# Altium PCB button.PcbDoc
Units mm, origin at the board's own origin, x right, y up, seen from the top; angles counter-clockwise.
Board outline 267 x 26.02 mm, 2 copper layers (Top Layer, Bottom Layer), stack 1.58 mm thick; 43 components, 52 nets, 200 pads, 21 vias.
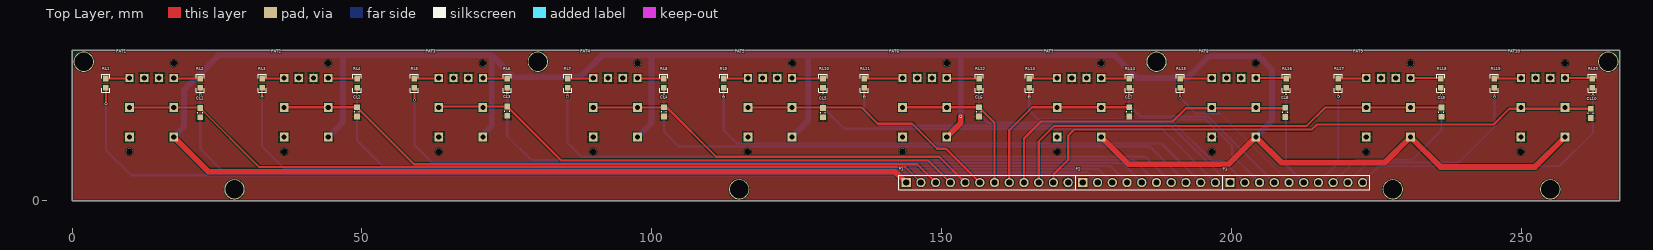
[diagram p0: Top Layer view]
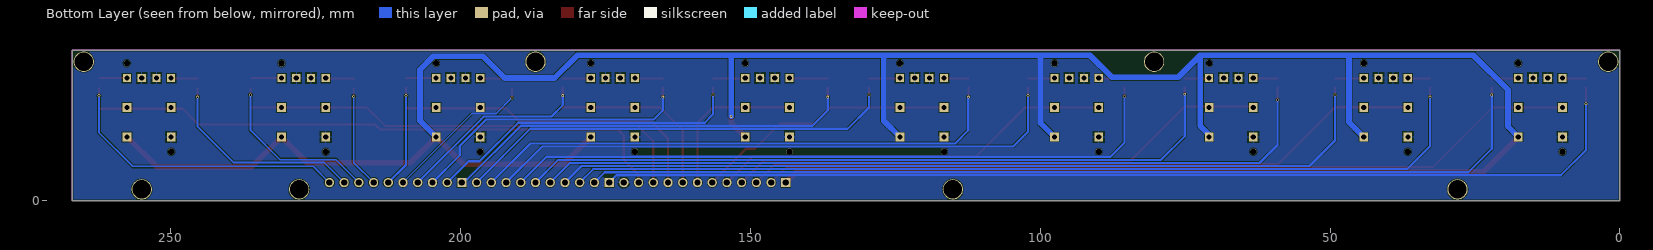
[diagram p1: Bottom Layer view, seen from below]
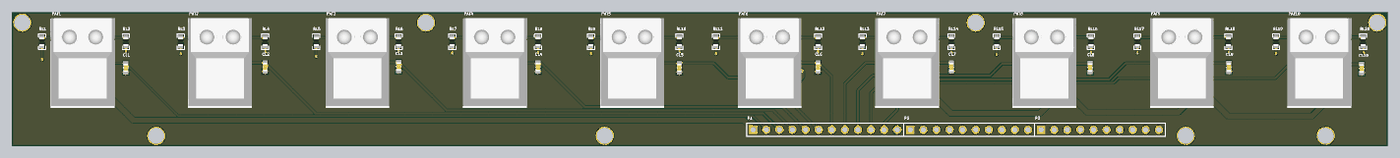
[diagram p2: 3D render of the assembled board from above, using the file's embedded part models]

## Layer stack, top to bottom
Top Solder: solder mask 0.0102, Solder Resist, Dk 3.5
Top Layer: signal copper 0.0356
Dielectric 1: dielectric 1.509, FR-4, Dk 4.8
Bottom Layer: signal copper 0.0356
Bottom Solder: solder mask 0.0102, Solder Resist, Dk 3.5

## Board outline
0,0 267,0 267,26.016 0,26.016

## Design rules (kind name [scope] priority, off if disabled: settings)
Clearance [All] p1: gap=0.15 ignorepadtopadclearanceinfootprint=FALSE
ComponentClearance [All] p1 off: gap=0.254 collisioncheckmode=3 verticalgap=2540 showdistances=FALSE
Height [All] p1: minheight=0 maxheight=100 prefheight=12.7
HoleSize [All] p1 off: absolutevalues=TRUE maxlimit=2.54 minlimit=0.025 maxpercent=80.000 minpercent=20.000
HoleToHoleClearance [All] p1 off: gap=0.254 allowstackedmicrovias=TRUE
MinimumSolderMaskSliver [All] p1 off: minsoldermaskwidth=0.254
PolygonConnect [All] p1: thpad.connectstyle=Relief thpad.reliefconductorwidth=0.254 thpad.reliefentries=4 thpad.polygonreliefangle="90 Angle" thpad.airgapwidth=0.254 smdpad.connectstyle=Relief smdpad.reliefconductorwidth=0.254 smdpad.reliefentries=4 smdpad.polygonreliefangle="90 Angle" smdpad.airgapwidth=0.254 via.connectstyle=Direct via.reliefconductorwidth=0.254 via.reliefentries=4 via.polygonreliefangle="90 Angle" via.airgapwidth=0.254
RoutingVias [All] p1: holewidth=0.3 width=0.5 viastyle="Through Hole" minholewidth=0.2 minwidth=0.4 maxholewidth=8 maxwidth=10
SilkToSilkClearance [All] p1 off: silktosilkclearance=0.254
SilkToSolderMaskClearance [IsPad] p1 off: minsilkscreentomaskgap=0.254 clearancetoexposedcopper=TRUE
SolderMaskExpansion SolderMaskExpansion_1 [IsVia] p1: expansion=0 soldermaskfromhole=TRUE
SolderMaskExpansion [All] p2: expansion=0.102
Width [All] p1: maxlimit=50 minlimit=0.2 preferedwidth=0.3
23 further rules are at their usual default settings.

## Components (designator, comment, footprint, x,y, rotation, side; value= is the part's Value field where it differs from the comment)
CL1 "0603" C0603 22.09,15.24 r90 top value=0.1uF
CL2 "0603" C0603 49.141,15.367 r90 top value=0.1uF
CL3 "0603" C0603 75.049,15.494 r90 top value=0.1uF
CL4 "0603" C0603 102.1,15.367 r90 top value=0.1uF
CL5 "0603" C0603 129.532,15.24 r90 top value=0.1uF
CL6 "0603" C0603 156.456,15.367 r90 top value=0.1uF
CL7 "0603" C0603 182.364,15.367 r90 top value=0.1uF
CL8 "0603" C0603 209.288,15.278 r90 top value=0.1uF
CL9 "0603" C0603 236.212,15.329 r90 top value=0.1uF
CL10 "0603" C0603 261.993,15.113 r90 top value=0.1uF
P1 "NC" "12P HEADER" 143.883,3.175 r0 top
P2 "NC" "10P HEADER" 174.363,3.175 r0 top
P3 "NC" "10P HEADER" 199.763,3.175 r0 top
PAT1 "55?-2LED01" 5501-2LED 13.708,16.129 r270 top
PAT2 "55?-2LED01" 5501-2LED 40.378,16.129 r270 top
PAT3 "55?-2LED01" 5501-2LED 67.048,16.129 r270 top
PAT4 "55?-2LED01" 5501-2LED 93.718,16.129 r270 top
PAT5 "55?-2LED01" 5501-2LED 120.388,16.129 r270 top
PAT6 "55?-2LED01" 5501-2LED 147.058,16.129 r270 top
PAT7 "55?-2LED01" 5501-2LED 173.728,16.129 r270 top
PAT8 "55?-2LED01" 5501-2LED 200.398,16.129 r270 top
PAT9 "55?-2LED01" 5501-2LED 227.068,16.129 r270 top
PAT10 "55?-2LED01" 5501-2LED 253.738,16.129 r270 top
RL1 "0603" R0603 5.834,20.32 r90 top value=330
RL2 "0603" R0603 22.09,20.32 r90 top value=330
RL3 "0603" R0603 32.758,20.32 r90 top value=330
RL4 "0603" R0603 49.141,20.32 r90 top value=330
RL5 "0603" R0603 59.047,20.32 r90 top value=330
RL6 "0603" R0603 75.049,20.32 r90 top value=330
RL7 "0603" R0603 85.463,20.32 r90 top value=330
RL8 "0603" R0603 102.1,20.32 r90 top value=330
RL9 "0603" R0603 112.387,20.32 r90 top value=330
RL10 "0603" R0603 129.532,20.32 r90 top value=330
RL11 "0603" R0603 136.644,20.32 r90 top value=330
RL12 "0603" R0603 156.456,20.32 r90 top value=330
RL13 "0603" R0603 165.092,20.32 r90 top value=330
RL14 "0603" R0603 182.364,20.32 r90 top value=330
RL15 "0603" R0603 191.127,20.32 r90 top value=330
RL16 "0603" R0603 209.415,20.32 r90 top value=330
RL17 "0603" R0603 218.432,20.32 r90 top value=330
RL18 "0603" R0603 236.085,20.32 r90 top value=330
RL19 "0603" R0603 245.356,20.32 r90 top value=330
RL20 "0603" R0603 262.247,20.32 r90 top value=330

## Footprints (in the part's own frame and the unit in brackets; to place one, negate y for a bottom-side part, rotate by r counter-clockwise, add the part's x,y. Pads: shape width x height; smd on the part's side, far side on the other; paste and mask are expansions set on the pad)
"10P HEADER" [mm] "Connector; Header; 10 Position"
  rect 1.6x1.6 hole 1.1: 1(0,0)
  round 1.6 hole 1.1: 2(2.54,0) 3(5.08,0) 4(7.62,0) 5(10.16,0) 6(12.7,0) 7(15.24,0) 8(17.78,0) 9(20.32,0) 10(22.86,0)
  silkscreen extent -1.27,-1.27 24.13,1.27
"12P HEADER" [mm] "Connector; Header; 12 Position"
  rect 1.6x1.6 hole 1.1: 1(0,0)
  round 1.6 hole 1.1: 2(2.54,0) 3(5.08,0) 4(7.62,0) 5(10.16,0) 6(12.7,0) 7(15.24,0) 8(17.78,0) 9(20.32,0) 10(22.86,0) 11(25.4,0) 12(27.94,0)
  silkscreen extent -1.27,-1.27 29.21,1.27
5501-2LED [mil] "5501-2LED"
  rect 59.06x59.06 / inner rect 60x60 / far side rect 59.06x59.06 hole 35.43: 1A(0,150) 1B(0,-150) NC(200,-150) NO(200,150)
  rect 56x56 / inner rect 60x60 / far side rect 56x56 hole 35.43: +G(-200,150) +R(-200,-150) -G(-200,50) -R(-200,-50)
  round 43.31 hole 43.31 unplated: MH1(-300,150) MH2(300,-150)
  body extent -344,-244 344,244, height 555
C0603 [mm] "0603_095"
  rect 1x1 smd: 1(-0.8,0) 2(0.8,0)
  silkscreen extent -0.08,-0.41 0.08,0.41, body extent -0.93,-0.41 0.93,0.41, height 0.81
R0603 [mm] "0603 from SM-752 data"
  rect 1x0.95 smd: 1(-0.8,0) 2(0.8,0)
  silkscreen extent -1.52,-0.69 1.52,0.69, body extent -0.87,-0.47 0.88,0.48, height 0.54

## Part data
CL1 CL2 CL3 CL4 CL5 CL6 CL7 CL8 CL9 CL10: library part Cap, "CAP CER 0.1UF 50V X5R 0603", Capacitance=100nF, Case Code (Metric)=1608, Dielectric=X5R, Manufacturer 1=Yageo, Manufacturer Part Number 1=CC0603KRX5R9BB104, Max Operating Temperature=85°C, Min Operating Temperature=-55°C, Package Quantity=4000, Supplier Part Number 1=311-4046-1-ND, Tolerance=10%, Voltage Rating=50V, Case/Package=0603, Case Code (Imperial)=0603, ComponentLink1Description=https://datasheet.ciiva.com/30062/tmk212bbj106kg-t-30062083.pdf?src-supplier=Onlinecomponents.com, ComponentLink1URL=https://datasheet.ciiva.com/30062/tmk212bbj106kg-t-30062083.pdf?src-supplier=Onlinecomponents.com, ComponentLink2Description=https://datasheet.ciiva.com/139/mlcc-all-e-139570.pdf?src-supplier=Digi-Key, ComponentLink2URL=https://datasheet.ciiva.com/139/mlcc-all-e-139570.pdf?src-supplier=Digi-Key, ComponentLink3Description=https://datasheet.ciiva.com/139/mlcc-all-e-139571.pdf?src-supplier=Digi-Key, ComponentLink3URL=https://datasheet.ciiva.com/139/mlcc-all-e-139571.pdf?src-supplier=Digi-Key, ComponentLink4Description=https://datasheet.ciiva.com/139/mlcc-all-e-139572.pdf?src-supplier=Digi-Key, ComponentLink4URL=https://datasheet.ciiva.com/139/mlcc-all-e-139572.pdf?src-supplier=Digi-Key, ComponentLink5Description=https://datasheet.ciiva.com/7975/1481447-7975820.pdf?src-supplier=Element14, ComponentLink5URL=https://datasheet.ciiva.com/7975/1481447-7975820.pdf?src-supplier=Element14, ComponentLink6Description=https://datasheet.ciiva.com/144/mlccorderingcode-144037.pdf?src-supplier=Digi-Key, ComponentLink6URL=https://datasheet.ciiva.com/144/mlccorderingcode-144037.pdf?src-supplier=Digi-Key, ComponentLink7Description=https://datasheet.ciiva.com/8033/1489800-8033669.pdf?src-supplier=Element14, ComponentLink7URL=https://datasheet.ciiva.com/8033/1489800-8033669.pdf?src-supplier=Element14, ComponentLink8Description=https://datasheet.ciiva.com/15189/getdatasheetpartid-321421-15189125.pdf?src-supplier=Verical, ComponentLink8URL=https://datasheet.ciiva.com/15189/getdatasheetpartid-321421-15189125.pdf?src-supplier=Verical, ComponentLink9Description=https://datasheet.ciiva.com/144/mlccorderingcode-144038.pdf?src-supplier=Digi-Key, ComponentLink9URL=https://datasheet.ciiva.com/144/mlccorderingcode-144038.pdf?src-supplier=Digi-Key, ComponentLink10Description=https://datasheet.ciiva.com/28450/1489800-28450342.pdf?src-supplier=Element14, ComponentLink10URL=https://datasheet.ciiva.com/28450/1489800-28450342.pdf?src-supplier=Element14, ComponentLink11Description=https://datasheet.ciiva.com/144/mlccorderingcode-144039.pdf?src-supplier=Digi-Key, ComponentLink11URL=https://datasheet.ciiva.com/144/mlccorderingcode-144039.pdf?src-supplier=Digi-Key, ComponentLink12Description=https://datasheet.ciiva.com/8033/1489800-8033671.pdf?src-supplier=Element14, ComponentLink12URL=https://datasheet.ciiva.com/8033/1489800-8033671.pdf?src-supplier=Element14, ComponentLink13Description=http://www.farnell.com/datasheets/1872206.pdf?src-supplier=Farnell, ComponentLink13URL=http://www.farnell.com/datasheets/1872206.pdf?src-supplier=Farnell, ComponentLink14Description=http://uk.rs-online.com/webdocs/144c/0900766b8144c113.pdf?src-supplier=RSComponents, ComponentLink14URL=http://uk.rs-online.com/webdocs/144c/0900766b8144c113.pdf?src-supplier=RSComponents, ComponentLink15Description=http://www.farnell.com/datasheets/2048008.pdf?src-supplier=Farnell, ComponentLink15URL=http://www.farnell.com/datasheets/2048008.pdf?src-supplier=Farnell, ComponentLink16Description=http://www.mouser.com/ds/2/281/c02e-2905.pdf?src-supplier=Mouser, ComponentLink16URL=http://www.mouser.com/ds/2/281/c02e-2905.pdf?src-supplier=Mouser, ComponentLink17Description=http://components.arrow.com/part/dataview/0323_06361249?src-supplier=Arrow+Europe, ComponentLink17URL=http://components.arrow.com/part/dataview/0323_06361249?src-supplier=Arrow+Europe, ComponentLink18Description=https://search.murata.co.jp/Ceramy/image/img/A01X/G101/ENG/GRM155R71E104KE14-01.pdf?src-supplier=Digi-Key, ComponentLink18URL=https://search.murata.co.jp/Ceramy/image/img/A01X/G101/ENG/GRM155R71E104KE14-01.pdf?src-supplier=Digi-Key, ComponentLink19Description=http://www.farnell.com/datasheets/2048008.pdf?src-supplier=Newark, ComponentLink19URL=http://www.farnell.com/datasheets/2048008.pdf?src-supplier=Newark, ComponentLink20Description=http://psearch.en.murata.com/capacitor/product/GRM155R71E104KE14%23.pdf?src-supplier=Avnet, ComponentLink20URL=http://psearch.en.murata.com/capacitor/product/GRM155R71E104KE14%23.pdf?src-supplier=Avnet, ComponentLink21Description=http://www.farnell.com/datasheets/2048008.pdf?src-supplier=Element14, ComponentLink21URL=http://www.farnell.com/datasheets/2048008.pdf?src-supplier=Element14, ComponentLink22Description=http://www.mouser.com/ds/2/447/Yageo_UPY-GP_NP0_16V-to-50V_9-358835.pdf?src-supplier=Mouser, ComponentLink22URL=http://www.mouser.com/ds/2/447/Yageo_UPY-GP_NP0_16V-to-50V_9-358835.pdf?src-supplier=Mouser, ComponentLink23Description=http://www.yageo.com/documents/recent/UPY-GPHC_X5R_4V-to-50V_25.pdf?src-supplier=Digi-Key, ComponentLink23URL=http://www.yageo.com/documents/recent/UPY-GPHC_X5R_4V-to-50V_25.pdf?src-supplier=Digi-Key, ComponentLink24Description=http://www.yageo.com/exep/pages/download/literatures/ProductSelectionGuide%202014_Final_2.pdf?src-supplier=Digi-Key, ComponentLink24URL=http://www.yageo.com/exep/pages/download/literatures/ProductSelectionGuide%202014_Final_2.pdf?src-supplier=Digi-Key, Halogen Free="Halogen Free", Lead Free="Lead Free", Length=0.063inch, Mount="Surface Mount", Packaging="Tape and Reel", Pricing 1="1=0.10000, 10=0.05600, 50=0.03080, 100=0.02510, 500=0.01794, 1000=0.01410 (USD)", RoHS=Yes, Stock 1=3816, Supplier 1=Digi-Key, Termination=SMD/SMT, Thickness=0.035inch, Voltage Rating (DC)=50V, Weight=7.1E-05oz, Width=0.031inch
P1: library part "Header 12", "Header, 12-Pin", LatestRevisionDate=17-Jul-2002, LatestRevisionNote="Re-released for DXP Platform.", Publisher="Altium Limited"
P2 P3: library part "Header 10", "Header, 10-Pin", LatestRevisionDate=17-Jul-2002, LatestRevisionNote="Re-released for DXP Platform.", Publisher="Altium Limited"
PAT1 PAT2 PAT3 PAT4 PAT5 PAT6 PAT7 PAT8 PAT9 PAT10: library part 5501MBLKREDGRN, "Pushbutton Switch SPDT Keyswitch, Illuminated Through Hole", Current Rating=300mA, Manufacturer 1=E-Switch, Max Operating Temperature=65°C, Min Operating Temperature=-25°C, Package Quantity=500, Supplier Part Number 1=EG171571-ND, Voltage Rating (DC)=12V, Actuator Type="Square, Button", ComponentLink1Description=https://datasheet.ciiva.com/2870/xr0104p-2870260.pdf?src-supplier=Digi-Key, ComponentLink1URL=https://datasheet.ciiva.com/2870/xr0104p-2870260.pdf?src-supplier=Digi-Key, Illumination Type=LED, Manufacturer Part Number 1=5501MBLKREDGRN, Mechanical Life=500000Cycles, Mount="Through Hole", Packaging=Bulk, Pricing 1="1=5.08000, 10=4.53000, 25=4.28800, 50=4.13420, 100=3.93620, 250=3.76028, 500=3.43044, 1000=3.25452 (USD)", RoHS=Yes, Stock 1=420, Supplier 1=Digi-Key, Switch Function=On-Mom, Termination="PC Pin", Throw Configuration=SPDT
RL1 RL2 RL3 RL4 RL5 RL6 RL7 RL8 RL9 RL10 RL11 RL12 RL13 RL14 RL15 RL16 RL17 RL18 RL19 RL20: library part Res1, "RES SMD 330 OHM 1% 1/10W 0603", Case Code (Metric)=1608, Manufacturer 1=Yageo, Manufacturer Part Number 1=RC0603FR-07330RL, Max Operating Temperature=155°C, Max Power Dissipation=100mW, Min Operating Temperature=-55°C, Package Quantity=1, Resistance=330R, Supplier Part Number 1=311-330HRCT-ND, Temperature Coefficient=100ppm/°C, Tolerance=1%, Voltage Rating=50V, Case/Package=0603, Case Code (Imperial)=0603, ComponentLink1Description=https://datasheet.ciiva.com/11819/0900766b80c66297-11819490.pdf?src-supplier=RSComponents, ComponentLink1URL=https://datasheet.ciiva.com/11819/0900766b80c66297-11819490.pdf?src-supplier=RSComponents, ComponentLink2Description=https://datasheet.ciiva.com/7849/1018594-7849962.pdf?src-supplier=Element14, ComponentLink2URL=https://datasheet.ciiva.com/7849/1018594-7849962.pdf?src-supplier=Element14, ComponentLink3Description=https://datasheet.ciiva.com/17083/pyu-rc0402-51-rohs-l-6-r-17083994.pdf?src-supplier=Future+Electronics, ComponentLink3URL=https://datasheet.ciiva.com/17083/pyu-rc0402-51-rohs-l-6-r-17083994.pdf?src-supplier=Future+Electronics, ComponentLink4Description=https://datasheet.ciiva.com/7849/1018594-7849963.pdf?src-supplier=Element14, ComponentLink4URL=https://datasheet.ciiva.com/7849/1018594-7849963.pdf?src-supplier=Element14, ComponentLink5Description=https://datasheet.ciiva.com/2453/pyu-r-int-thick-7-2453661.pdf?src-supplier=Digi-Key, ComponentLink5URL=https://datasheet.ciiva.com/2453/pyu-r-int-thick-7-2453661.pdf?src-supplier=Digi-Key, ComponentLink6Description=https://datasheet.ciiva.com/2453/pyu-r-int-thick-7-2453662.pdf?src-supplier=Digi-Key, ComponentLink6URL=https://datasheet.ciiva.com/2453/pyu-r-int-thick-7-2453662.pdf?src-supplier=Digi-Key, ComponentLink7Description=https://datasheet.ciiva.com/2453/pyu-r-int-thick-7-2453663.pdf?src-supplier=Digi-Key, ComponentLink7URL=https://datasheet.ciiva.com/2453/pyu-r-int-thick-7-2453663.pdf?src-supplier=Digi-Key, ComponentLink8Description=https://datasheet.ciiva.com/12656/pyu-rc0402-51-rohs-l-6-r-12656815.pdf?src-supplier=Mouser, ComponentLink8URL=https://datasheet.ciiva.com/12656/pyu-rc0402-51-rohs-l-6-r-12656815.pdf?src-supplier=Mouser, ComponentLink9Description=https://datasheet.ciiva.com/11819/0900766b80f96399-11819327.pdf?src-supplier=RSComponents, ComponentLink9URL=https://datasheet.ciiva.com/11819/0900766b80f96399-11819327.pdf?src-supplier=RSComponents, ComponentLink10Description=https://datasheet.ciiva.com/2454/pyu-r-int-thick-7-2454864.pdf?src-supplier=Digi-Key, ComponentLink10URL=https://datasheet.ciiva.com/2454/pyu-r-int-thick-7-2454864.pdf?src-supplier=Digi-Key, ComponentLink11Description=https://datasheet.ciiva.com/2454/pyu-r-int-thick-7-2454865.pdf?src-supplier=Digi-Key, ComponentLink11URL=https://datasheet.ciiva.com/2454/pyu-r-int-thick-7-2454865.pdf?src-supplier=Digi-Key, ComponentLink12Description=https://datasheet.ciiva.com/2454/pyu-r-int-thick-7-2454866.pdf?src-supplier=Digi-Key, ComponentLink12URL=https://datasheet.ciiva.com/2454/pyu-r-int-thick-7-2454866.pdf?src-supplier=Digi-Key, ComponentLink13Description=https://datasheet.ciiva.com/12555/rc0603-272842-12555334.pdf?src-supplier=Mouser, ComponentLink13URL=https://datasheet.ciiva.com/12555/rc0603-272842-12555334.pdf?src-supplier=Mouser, ComponentLink14Description=https://datasheet.ciiva.com/46440/1868787-46440904.pdf?src-supplier=Element14, ComponentLink14URL=https://datasheet.ciiva.com/46440/1868787-46440904.pdf?src-supplier=Element14, ComponentLink15Description=https://datasheet.ciiva.com/7746/443971-7746329.pdf?src-supplier=Element14, ComponentLink15URL=https://datasheet.ciiva.com/7746/443971-7746329.pdf?src-supplier=Element14, ComponentLink16Description=https://datasheet.ciiva.com/7746/443971-7746330.pdf?src-supplier=Element14, ComponentLink16URL=https://datasheet.ciiva.com/7746/443971-7746330.pdf?src-supplier=Element14, ComponentLink17Description=https://datasheet.ciiva.com/7746/1686128-7746331.pdf?src-supplier=Element14, ComponentLink17URL=https://datasheet.ciiva.com/7746/1686128-7746331.pdf?src-supplier=Element14, Composition="Thick Film", Depth=0.8mm, Features="Moisture Resistant", Height=0.45mm, Lead Free="Lead Free", Length=1.6mm, Number of Pins=2, Number of Terminations=2, Packaging="Tape and Reel", Power Rating=100mW, Pricing 1="1=0.10000, 10=0.02300, 100=0.00940, 1000=0.00421, 2500=0.00366 (USD)", REACH SVHC="No SVHC", RoHS=Yes, Stock 1=3885547, Supplier 1=Digi-Key, Termination=SMD/SMT, Voltage Rating (DC)=50V, Width=0.8mm

## Free pads (board coordinates)
  round 3.5 hole 3.175: ""(2,24.016) ""(28,2) ""(80.354,24.016) ""(115.062,2) ""(187.071,24.016) ""(227.838,2) ""(255,2) ""(265,24.016)

## Via types
v1: diameter 0.5, hole 0.3, Top Layer to Bottom Layer, 21 vias

## Nets (pads, with @x,y where several pads share a name; then routed paths per layer and width w, separated by ;. In a path a pad name is that pad's centre, name@x,y a point inside that pad or via, vN(x,y) a via of type N, cw(c..) or ccw(c..) an arc to the next point about the centre after c; other vN are vias at no path point)
5V: P1.1 PAT1.NO PAT2.NO PAT3.NO PAT4.NO PAT5.NO PAT6.NO PAT7.NO PAT8.NO PAT9.NO PAT10.NO | length 516.1
  Top Layer w1: PAT1.NO 23.525,5.042 142.016,5.042 P1.1 ; PAT6.NO 153.289,13.47 v1(153.289,14.605) ; PAT7.NO 182.237,6.35 199.509,6.35 PAT8.NO 208.653,6.604 226.433,6.604 PAT9.NO 236.085,5.842 252.341,5.842 PAT10.NO
  Bottom Layer w1: PAT1.NO 19.304,12.835 19.304,19.177 25.273,25.146 46.736,25.146 ; PAT2.NO 46.736,13.597 46.736,25.146 ; PAT3.NO 70.858,11.422 72.39,12.954 72.39,25.146 ; PAT4.NO 99.949,13.47 99.949,25.146 ; PAT5.NO 127,13.851 127,25.146 ; v1(153.289,14.605) 153.289,24.892 153.035,25.146 ; PAT8.NO 207.01,13.851 207.01,22.644 204.705,24.949 196.145,24.949 192.391,21.195 183.783,21.195 179.832,25.146 153.035,25.146 ; 46.736,25.146 72.39,25.146 ; 72.39,25.146 76.2,21.336 87.63,21.336 91.44,25.146 99.949,25.146 ; 99.949,25.146 127,25.146 ; 127,25.146 153.035,25.146
BTN1: CL1.2 P1.2 PAT1.1A PAT1.1B | length 141.9
  Top Layer w0.3: PAT1.1B PAT1.1A 22.001,16.129 CL1.2 32.288,5.842 143.756,5.842 P1.2
BTN2: CL2.2 P1.3 PAT2.1A PAT2.1B | length 117.8
  Top Layer w0.381: PAT2.1B 36.606,16.167 CL2.2 58.958,6.35 145.788,6.35 P1.3
BTN3: CL3.2 P1.4 PAT3.1A PAT3.1B | length 93.8
  Top Layer w0.381: PAT3.1B 63.403,16.294 CL3.2 84.358,6.985 147.693,6.985 P1.4
BTN4: CL4.2 P1.5 PAT4.1A PAT4.1B | length 69.5
  Top Layer w0.381: PAT4.1B PAT4.1A 102.616,16.129 111.127,7.618 149.6,7.618 P1.5
BTN5: CL5.2 P1.6 PAT5.1A PAT5.1B | length 45.4
  Top Layer w0.381: PAT5.1B PAT5.1A 136.198,16.129 138.992,13.335 144.907,13.335 149.225,9.017 150.741,9.017 P1.6
BTN6: CL6.2 P1.7 PAT6.1A PAT6.1B | length 27.3
  Top Layer w0.381: PAT6.1B 143.286,16.167 CL6.2 159.123,13.5 P1.7
BTN7: CL7.2 P1.8 PAT7.1A PAT7.1B | length 31.4
  Top Layer w0.381: P1.8 161.663,12.184 165.646,16.167 CL7.2
BTN8: CL8.2 P1.9 PAT8.1A PAT8.1B | length 54.9
  Top Layer w0.381: P1.9 164.203,10.787 167.132,13.716 189.865,13.716 192.151,16.002 209.212,16.002 CL8.2
BTN9: CL9.2 P1.10 PAT9.1A PAT9.1B | length 79
  Top Layer w0.381: P1.10 166.743,10.279 169.418,12.954 212.979,12.954 216.154,16.129 PAT9.1B PAT9.1A CL9.2
BTN10: CL10.2 P1.11 PAT10.1A PAT10.1B | length 101.3
  Top Layer w0.381: P1.11 169.283,4.564 171.831,7.112 171.831,11.303 172.847,12.319 213.868,12.319 214.757,13.208 245.237,13.208 247.942,15.913 CL10.2
G1: P2.2 RL2.1 | length 167.7
  Top Layer w0.381: RL2.1 22.094,19.516 22.094,18.292 v1(22.098,18.288)
  Bottom Layer w0.381: v1(22.098,18.288) 22.098,9.017 26.152,4.963 175.115,4.963 P2.2
G2: P2.4 RL4.1 | length 144.9
  Top Layer w0.381: RL4.1 49.145,19.516 49.145,18.292 v1(49.149,18.288)
  Bottom Layer w0.381: v1(49.149,18.288) 49.149,10.414 53.538,6.025 179.133,6.025 P2.4
G3: P2.6 RL6.1 | length 123.7
  Top Layer w0.381: RL6.1 75.053,19.516 75.053,18.419 v1(75.057,18.415)
  Bottom Layer w0.381: v1(75.057,18.415) 75.057,11.176 79.146,7.087 183.151,7.087 P2.6
G4: P2.8 RL8.1 | length 101.3
  Top Layer w0.381: RL8.1 102.104,19.516 102.104,18.165 v1(102.108,18.161)
  Bottom Layer w0.381: v1(102.108,18.161) 102.108,11.938 104.646,9.4 185.919,9.4 P2.8
G5: P2.10 RL10.1 | length 76.4
  Top Layer w0.381: RL10.1 129.536,19.516 129.536,18.292 v1(129.54,18.288)
  Bottom Layer w0.381: v1(129.54,18.288) 129.54,16.129 133.223,12.446 187.952,12.446 P2.10
G6: P3.2 RL12.1 | length 55.3
  Top Layer w0.381: RL12.1 156.46,19.516 156.46,18.292 v1(156.464,18.288)
  Bottom Layer w0.381: v1(156.464,18.288) 156.464,14.905 157.861,13.508 190.065,13.508 196.715,6.858 198.62,6.858 P3.2
G7: P3.4 RL14.1 | length 33.5
  Top Layer w0.381: RL14.1 182.368,19.516 182.368,18.165 v1(182.372,18.161)
  Bottom Layer w0.381: v1(182.372,18.161) 182.372,16.533 184.317,14.588 195.97,14.588 196.444,14.115 P3.4
G8: P3.6 RL16.1 | length 17.6
  Top Layer w0.381: RL16.1 209.419,19.516 209.419,18.165 v1(209.423,18.161)
  Bottom Layer w0.381: v1(209.423,18.161) 209.423,6.215 P3.6
G9: P3.8 RL18.1 | length 29.8
  Top Layer w0.3: RL18.1 236.22,19.385 v1(236.22,18.288)
  Bottom Layer w0.3: P3.8 221.48,7.112 231.14,7.112 236.22,12.192 v1(236.22,18.288)
G10: P3.10 RL20.1 | length 51.1
  Top Layer w0.3: RL20.1 262.382,19.385 v1(262.382,18.161)
  Bottom Layer w0.3: P3.10 225.417,5.969 256.54,5.969 262.382,11.811 v1(262.382,18.161)
GND: CL1.1 CL2.1 CL3.1 CL4.1 CL5.1 CL6.1 CL7.1 CL8.1 CL9.1 CL10.1 P1.12 PAT1.-G PAT1.-R PAT1.NC PAT2.-G PAT2.-R PAT2.NC PAT3.-G PAT3.-R PAT3.NC PAT4.-G PAT4.-R PAT4.NC PAT5.-G PAT5.-R PAT5.NC PAT6.-G PAT6.-R PAT6.NC PAT7.-G PAT7.-R PAT7.NC PAT8.-G PAT8.-R PAT8.NC PAT9.-G PAT9.-R PAT9.NC PAT10.-G PAT10.-R PAT10.NC
NetPAT1_+G: PAT1.+G RL2.2 | length 4.6
  Top Layer w0.381: PAT1.+G 17.607,21.12 RL2.2
NetPAT1_+R: PAT1.+R RL1.2 | length 4.1
  Top Layer w0.381: RL1.2 9.809,21.12 PAT1.+R
NetPAT2_+G: PAT2.+G RL4.2 | length 5
  Top Layer w0.381: PAT2.+G 44.277,21.12 RL4.2
NetPAT2_+R: PAT2.+R RL3.2 | length 3.8
  Top Layer w0.381: RL3.2 36.479,21.12 PAT2.+R
NetPAT3_+G: PAT3.+G RL6.2 | length 4.2
  Top Layer w0.381: PAT3.+G 70.947,21.12 RL6.2
NetPAT3_+R: PAT3.+R RL5.2 | length 4.2
  Top Layer w0.381: RL5.2 63.149,21.12 PAT3.+R
NetPAT4_+G: PAT4.+G RL8.2 | length 4.6
  Top Layer w0.381: PAT4.+G 97.617,21.12 RL8.2
NetPAT4_+R: PAT4.+R RL7.2 | length 4.5
  Top Layer w0.381: RL7.2 89.819,21.12 PAT4.+R
NetPAT5_+G: PAT5.+G RL10.2 | length 5.4
  Top Layer w0.381: PAT5.+G 124.287,21.12 RL10.2
NetPAT5_+R: PAT5.+R RL9.2 | length 4.2
  Top Layer w0.381: RL9.2 116.489,21.12 PAT5.+R
NetPAT6_+G: PAT6.+G RL12.2 | length 5.6
  Top Layer w0.381: PAT6.+G 150.957,21.12 RL12.2
NetPAT6_+R: PAT6.+R RL11.2 | length 6.6
  Top Layer w0.381: RL11.2 143.159,21.12 PAT6.+R
NetPAT7_+G: PAT7.+G RL14.2 | length 4.9
  Top Layer w0.381: PAT7.+G 177.627,21.12 RL14.2
NetPAT7_+R: PAT7.+R RL13.2 | length 4.9
  Top Layer w0.381: RL13.2 169.829,21.12 PAT7.+R
NetPAT8_+G: PAT8.+G RL16.2 | length 5.2
  Top Layer w0.3: PAT8.+G 209.326,21.209 RL16.2
NetPAT8_+R: PAT8.+R RL15.2 | length 5.5
  Top Layer w0.3: RL15.2 196.499,21.12 PAT8.+R
NetPAT9_+G: PAT9.+G RL18.2 | length 5.2
  Top Layer w0.3: PAT9.+G 235.996,21.209 RL18.2
NetPAT9_+R: PAT9.+R RL17.2 | length 4.9
  Top Layer w0.3: RL17.2 223.169,21.12 PAT9.+R
NetPAT10_+G: PAT10.+G RL20.2 | length 4.7
  Top Layer w0.3: PAT10.+G 262.158,21.209 RL20.2
NetPAT10_+R: PAT10.+R RL19.2 | length 4.6
  Top Layer w0.3: RL19.2 249.839,21.12 PAT10.+R
R1: P2.1 RL1.1 | length 181.6
  Top Layer w0.381: RL1.1 5.834,16.772 v1(5.842,16.764)
  Bottom Layer w0.381: v1(5.842,16.764) 5.842,8.763 10.173,4.432 173.106,4.432 P2.1
R2: P2.3 RL3.1 | length 159.4
  Top Layer w0.381: RL3.1 32.762,19.516 32.762,17.911 v1(32.766,17.907)
  Bottom Layer w0.381: v1(32.766,17.907) 32.766,9.444 36.716,5.494 177.124,5.494 P2.3
R3: P2.5 RL5.1 | length 138
  Top Layer w0.381: RL5.1 59.051,19.516 59.051,17.403 v1(59.055,17.399)
  Bottom Layer w0.381: v1(59.055,17.399) 59.055,9.652 62.151,6.556 181.142,6.556 P2.5
R4: P2.7 RL7.1 | length 116.5
  Top Layer w0.381: RL7.1 85.467,19.516 85.467,18.038 v1(85.471,18.034)
  Bottom Layer w0.381: v1(85.471,18.034) 85.471,10.033 87.886,7.618 185.16,7.618 P2.7
R5: P2.9 RL9.1 | length 93.4
  Top Layer w0.381: RL9.1 112.391,19.516 112.391,17.911 v1(112.395,17.907)
  Bottom Layer w0.381: v1(112.395,17.907) 112.395,12.192 114.656,9.931 187.928,9.931 P2.9
R6: P3.1 RL11.1 | length 72.2
  Top Layer w0.381: RL11.1 136.644,17.915 v1(136.652,17.907)
  Bottom Layer w0.381: v1(136.652,17.907) 136.652,15.621 139.296,12.977 189.58,12.977 198.823,3.735 199.204,3.735 P3.1
R7: P3.3 RL13.1 | length 49.7
  Top Layer w0.381: RL13.1 165.096,19.516 165.096,17.911 v1(165.1,17.907)
  Bottom Layer w0.381: v1(165.1,17.907) 165.1,15.621 166.664,14.057 195.561,14.057 200.152,9.467 200.152,7.866 P3.3
R8: P3.5 RL15.1 | length 26.6
  Top Layer w0.3: RL15.1 191.127,17.788 v1(191.135,17.78)
  Bottom Layer w0.3: v1(191.135,17.78) 193.836,15.079 198.019,15.079 P3.5
R9: P3.7 RL17.1 | length 17.8
  Top Layer w0.3: RL17.1 218.44,19.512 v1(218.44,18.034)
  Bottom Layer w0.3: P3.7 218.44,6.612 v1(218.44,18.034)
R10: P3.9 RL19.1 | length 36
  Top Layer w0.3: RL19.1 245.364,19.512 v1(245.364,17.907)
  Bottom Layer w0.3: P3.9 223.563,6.655 239.192,6.655 245.364,12.827 v1(245.364,17.907)
pads on no net: PAT1.MH1 PAT1.MH2 PAT2.MH1 PAT2.MH2 PAT3.MH1 PAT3.MH2 PAT4.MH1 PAT4.MH2 PAT5.MH1 PAT5.MH2 PAT6.MH1 PAT6.MH2 PAT7.MH1 PAT7.MH2 PAT8.MH1 PAT8.MH2 PAT9.MH1 PAT9.MH2 PAT10.MH1 PAT10.MH2

## Polygon pours and split planes (outlines as drawn)
GND on Top Layer "Top Layer-GND" (solid, remove dead copper, pour order 8): -0.254,25.908 -0.254,-0.127 268.097,-0.127 268.097,26.67
GND on Bottom Layer "Bottom Layer-GND" (solid, remove dead copper, pour order 10): -1.016,27.432 -1.016,-0.381 267.97,-0.381 267.97,27.813

## Keep-outs
Keep-Out Layer:
  the board outline again, w0.2